# EAGLE board Shield_Motor-REV3c (EAGLE 5.11)
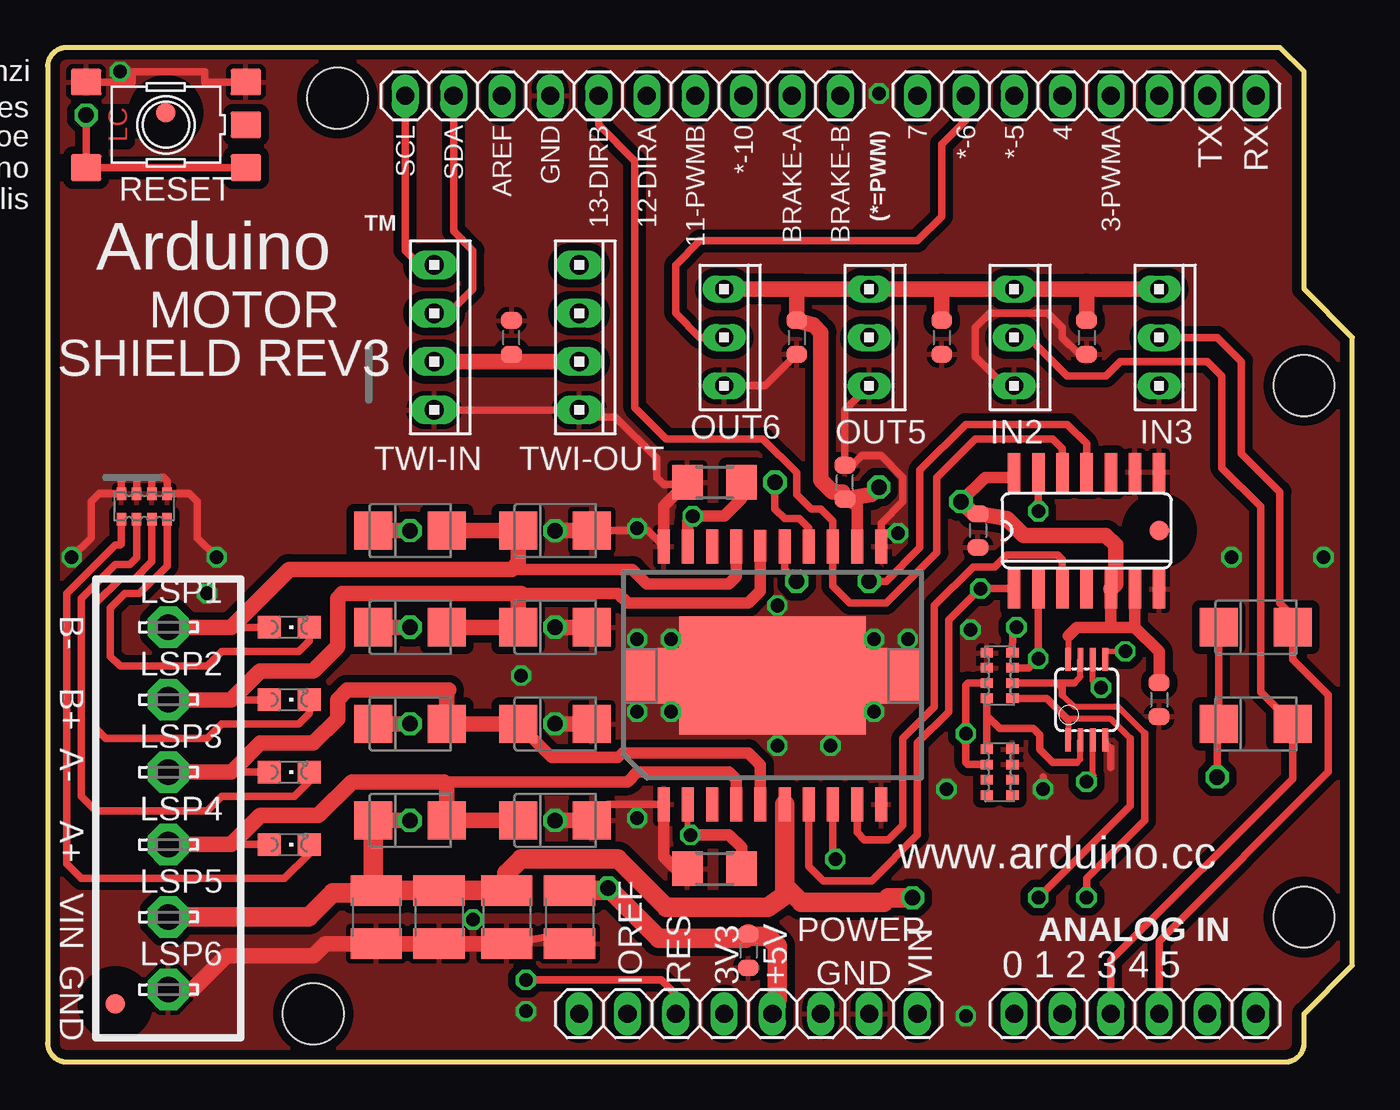
[diagram p0: board, top side]
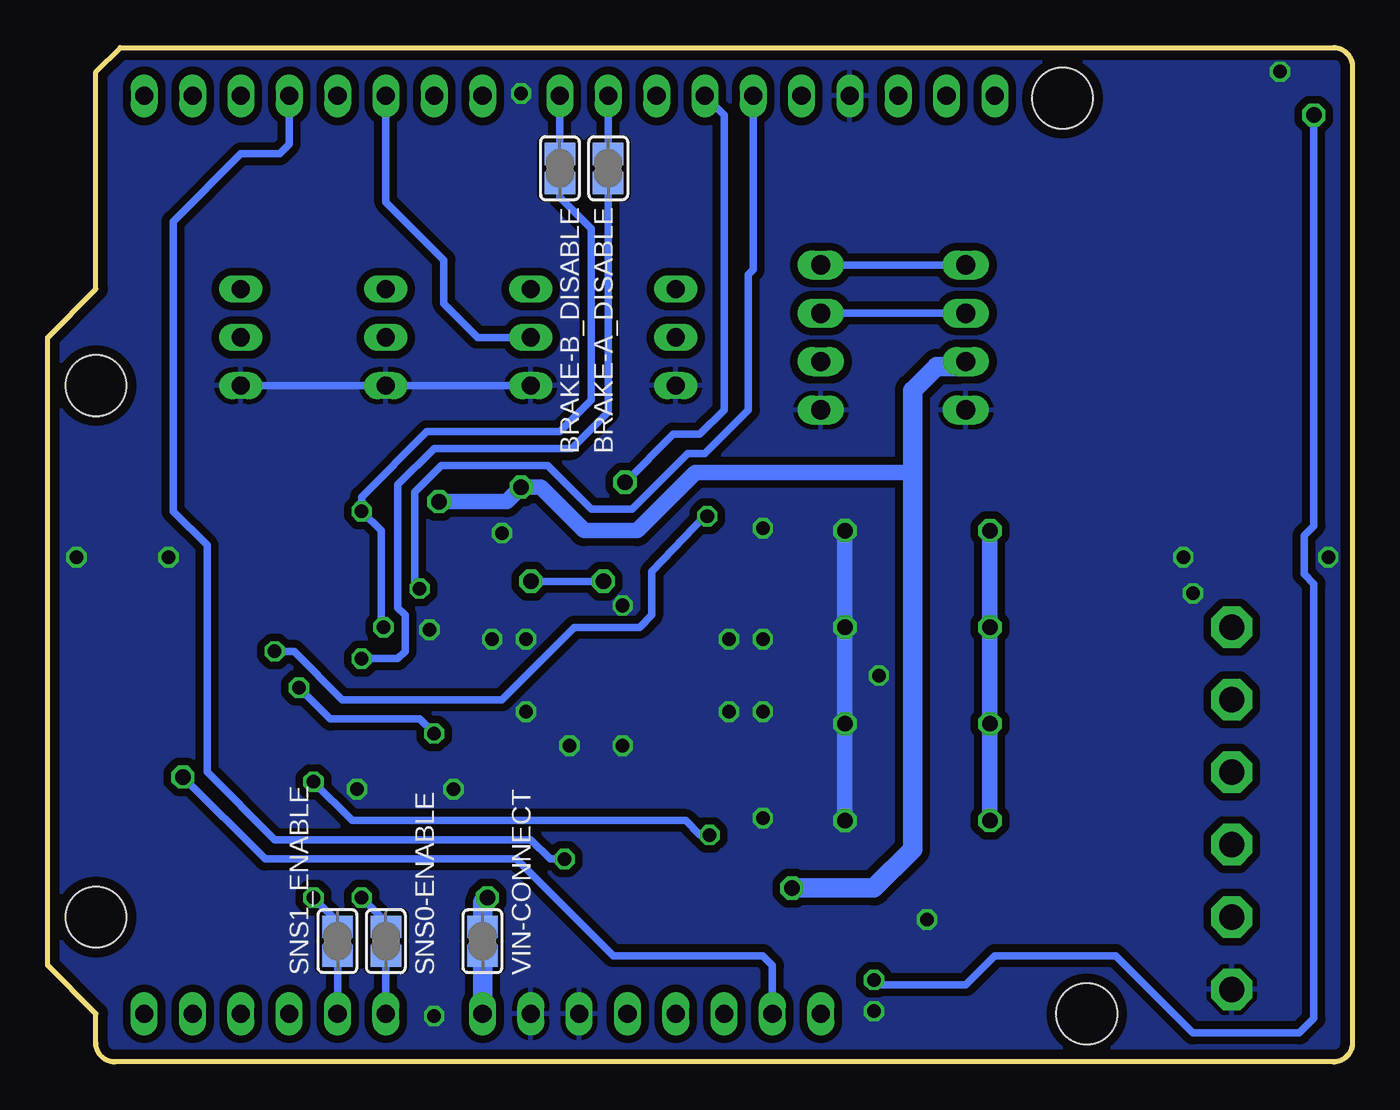
[diagram p1: board, bottom side, seen from below]

Size 68.58 x 53.34 mm. Coordinates in mm from the lower left corner, seen from the top.
Outline: 66.04,2.54 68.58,5.08 68.58,38.1 66.04,40.64 66.04,52.07 64.77,53.34 1,53.34 arc90 0,52.34 0,1 arc90 1,0 65.04,0 arc90 66.04,1 66.04,2.54
Copper layers (1*16): Top 0.035mm / dielectric 1.5mm / Bottom 0.035mm
Design rules "default *": minimum track width 10mil, minimum drill 10mil, track to track 12mil, track to pad 12mil, pad to pad 12mil, via to via 12mil, smd to smd 12mil, copper to edge 20mil, drill to drill 10mil, minimum pad ring 6mil, minimum via ring 6mil, stop-mask expansion 2mil, vias tented up to drill 32mil, thermal gap 10mil
Net classes: 0 default: width 0.406 mm, drill 0.61 mm, clearance 0.152 mm; 1 power: width 0.406 mm, drill 0.61 mm, clearance 0.152 mm; 2 VIN: width 0.406 mm, drill 0.61 mm, clearance 0.152 mm
Holes 3.2 mm at 66.04,35.56 66.04,7.62 15.24,50.67 13.97,2.54

## Footprints (pad centres in the part's own frame; a part is rotated, then mirrored left to right if it is on the bottom)
SJ = smd 1.168 x 1.6: 1 -0.762,0; 2 0.762,0
C0603-ROUND = smd 0.898 x 1.1: 1 -0.889,0; 2 0.889,0
C1210 = smd 1.6 x 2.7: 1 -1.4,0; 2 1.4,0
SMA = smd 2 x 2: P$1 -1.94,0; P$2 1.94,0
FIDUCIA-MOUNT = smd 1.016 x 1.016: P$1 0,0
POWER-SO20 = smd 0.635 x 1.778: P$1 -5.715,-6.782; P$2 -4.445,-6.782; P$3 -3.175,-6.782; P$4 -1.905,-6.782; P$5 -0.635,-6.782; P$6 0.635,-6.782; P$7 1.905,-6.782; P$8 3.175,-6.782; P$9 4.445,-6.782; P$10 5.715,-6.782; P$11 5.715,6.782; P$12 4.445,6.782; P$13 3.175,6.782; P$14 1.905,6.782; P$15 0.635,6.782; P$17 -1.905,6.782; P$18 -3.175,6.782; P$19 -4.445,6.782; P$20 -5.715,6.782 | smd 0.635 x 1.651: P$16 -0.635,6.833 | smd 9.804 x 6.198: P$21 0,0 | smd 3.048 x 2.921: P$22 -6.426,0; P$23 6.426,0
SO14 = smd 0.66 x 2.032: 1 -3.81,-3.073; 2 -2.54,-3.073; 3 -1.27,-3.073; 4 0,-3.073; 5 1.27,-3.073; 6 2.54,-3.073; 7 3.81,-3.073; 8 3.81,3.073; 9 2.54,3.073; 10 1.27,3.073; 11 0,3.073; 12 -1.27,3.073; 13 -2.54,3.073; 14 -3.81,3.073
MSOP08 = smd 0.3 x 1.2: 1 -0.976,-2.113; 2 -0.326,-2.113; 3 0.324,-2.113; 4 0.974,-2.113; 5 0.974,2.112; 6 0.324,2.112; 7 -0.326,2.112; 8 -0.976,2.112
10X03MTA = drill 0.95 long: 1 2.54,0; 2 0,0; 3 -2.54,0
1X06-TH = drill 0.95 pad 1.422 long: 1 -6.35,0; 2 -3.81,0; 3 -1.27,0; 4 1.27,0; 5 3.81,0; 6 6.35,0
1X10-TH = drill 0.95 pad 1.422 long: 1 -11.43,0; 2 -8.89,0; 3 -6.35,0; 4 -3.81,0; 5 -1.27,0; 6 1.27,0; 7 3.81,0; 8 6.35,0; 9 8.89,0; 10 11.43,0
1X08-TH = drill 0.95 pad 1.422 long: 1 -8.89,0; 2 -6.35,0; 3 -3.81,0; 4 -1.27,0; 5 1.27,0; 6 3.81,0; 7 6.35,0; 8 8.89,0
CHIPLED_0805 = smd 1.2 x 1.2: A 0,-1.05; C 0,1.05
LSP13 = drill 1.321 pad 2.159 octagon: MP 0,0
R1206 = smd 1.6 x 1.803: 1 -1.422,0; 2 1.422,0
TS42 = smd 1.6 x 1.4: 1 -4.2,2.25; 2 4.2,2.25; 3 -4.2,-2.25; 4 4.2,-2.25; 5 -4.2,0
CAY16 = smd 0.5 x 0.65: 1 -1.2,-0.675; 2 -0.4,-0.675; 3 0.4,-0.675; 4 1.2,-0.675; 5 1.2,0.675; 6 0.4,0.675; 7 -0.4,0.675; 8 -1.2,0.675
10X04MTA = drill 1.016 long: 1 3.81,0; 2 1.27,0; 3 -1.27,0; 4 -3.81,0

## Placement (x,y rotation side)
BRAKE-A_DISABLE  [SJ]  39.12,46.99 270 bottom
BRAKE-B_DISABLE  [SJ]  41.66,46.99 270 bottom
C1  100n  [C0603-ROUND]  39.37,38.1 270 top
C2  100n  [C0603-ROUND]  24.38,38.1 90 top
C3  100n  [C0603-ROUND]  54.61,38.1 270 top
C4  100n  [C0603-ROUND]  46.99,38.1 270 top
C5  10u 35V  [C1210]  27.43,7.62 270 top
C6  100n  [C0603-ROUND]  36.83,5.84 270 top
C7  100n  [C0603-ROUND]  41.91,30.48 90 top
C8  100n  [C0603-ROUND]  48.9,27.94 270 top
C9  10u 35V  [C1210]  24.13,7.62 270 top
C10  10u 35V  [C1210]  20.57,7.62 270 top
C11  10u 35V  [C1210]  17.27,7.62 270 top
C12  100n  [C0603-ROUND]  58.42,19.05 270 top
D1  SS14  [SMA]  19.05,12.7 0 top
D2  SS14  [SMA]  19.05,17.78 0 top
D3  SS14  [SMA]  19.05,22.86 0 top
D4  SS14  [SMA]  19.05,27.94 0 top
D5  SS14  [SMA]  26.67,12.7 0 top
D6  SS14  [SMA]  26.67,17.78 0 top
D7  SS14  [SMA]  26.67,22.86 0 top
D8  SS14  [SMA]  26.67,27.94 0 top
D9  SS14  [SMA]  63.5,22.86 0 top
D10  SS14  [SMA]  63.5,17.78 0 top
FID1  FIDUCIALMOUNT  [FIDUCIA-MOUNT]  6.22,49.91 0 top
FID2  FIDUCIALMOUNT  [FIDUCIA-MOUNT]  3.56,3.05 0 top
FID3  FIDUCIALMOUNT  [FIDUCIA-MOUNT]  58.42,27.94 0 top
IC1  L298P  [POWER-SO20]  38.1,20.32 0 top
IC2  4077D  [SO14]  54.61,27.94 0 top
IC4  LMV358MMX  [MSOP08]  54.61,19.05 0 top
IN2  white  [10X03MTA]  50.8,38.1 270 top
IN3  white  [10X03MTA]  58.42,38.1 270 top
JANALOG  6x1F-H8.5-L14.5mm  [1X06-TH]  57.15,2.54 0 top
JHIGH  10x1F-H8.5-L14.5mm  [1X10-TH]  30.23,50.8 180 top
JLOW  8x1F-H8.5-L14.5mm  [1X08-TH]  54.61,50.8 180 top
LED1  Yellow  [CHIPLED_0805]  12.7,11.43 270 top
LED2  Yellow  [CHIPLED_0805]  12.7,15.24 270 top
LED3  Yellow  [CHIPLED_0805]  12.7,19.05 270 top
LED4  Yellow  [CHIPLED_0805]  12.7,22.86 270 top
LSP1  LSP13  [LSP13]  6.35,22.86 0 top
LSP2  LSP13  [LSP13]  6.35,19.05 0 top
LSP3  LSP13  [LSP13]  6.35,15.24 0 top
LSP4  LSP13  [LSP13]  6.35,11.43 0 top
LSP5  LSP13  [LSP13]  6.35,7.62 0 top
LSP6  LSP13  [LSP13]  6.35,3.81 0 top
OUT5  orange  [10X03MTA]  43.18,38.1 270 top
OUT6  orange  [10X03MTA]  35.56,38.1 270 top
POWER  8x1F-H8.5-L14.5mm  [1X08-TH]  36.83,2.54 0 top
R1  0R15  [R1206]  35.05,10.16 180 top
R2  0R15  [R1206]  35.05,30.48 180 top
RESET  TS42  [TS42]  6.22,49.28 180 top
RN1  10K  [CAY16]  5.08,29.21 0 top
RN2  10K  [CAY16]  50.04,20.32 270 top
RN3  1K  [CAY16]  50.04,15.24 270 top
SNS0-ENABLE  [SJ]  50.8,6.35 90 bottom
SNS1_ENABLE  [SJ]  53.34,6.35 90 bottom
TWI-IN  [10X04MTA]  20.32,38.1 270 top
TWI-OUT  [10X04MTA]  27.94,38.1 270 top
U$1  DISCLAIMER  [DISCLAIMER]  -12.06,-22.86 0 top  (outside the outline)
VIN-CONNECT  [SJ]  45.72,6.35 90 bottom

## Library data of the parts
BRAKE-A_DISABLE BRAKE-B_DISABLE SNS0-ENABLE SNS1_ENABLE VIN-CONNECT = jumper
C1-C12 D1-D10 FID1-FID3 IC1 JANALOG JHIGH JLOW POWER R1 R2 RESET U$1 = SmartPrj
IC2 = 40xx
IC4 = linear
IN2 IN3 OUT5 OUT6 = SmartPrj; OC_FARNELL: unknown; OC_NEWARK: unknown
LED1-LED4 = led
LSP1-LSP6 = solpad
RN1-RN3 = resistor-dil
TWI-IN TWI-OUT = con-amp

## Nets
5: JLOW.6 OUT5.2
5-GND: RESET.5
6: JLOW.7 OUT6.2
+3V3 [power]: POWER.4
+5V [power]: C1.1 C2.1 C3.1 C4.1 C5.1 C6.1 C7.1 C8.1 C12.1 IC1.P$12 IC2.5 IC2.6 IC2.14 IC4.8 IN2.3 IN3.3 OUT5.3 OUT6.3 POWER.5 TWI-IN.2 TWI-OUT.2
A2: D10.P$2 IN2.2 JANALOG.3
A3: D9.P$2 IN3.2 JANALOG.4
A4: JANALOG.5
A5: JANALOG.6
AREF: JHIGH.8
BRAKEA: BRAKE-A_DISABLE.1 BRAKE-A_DISABLE.2 IC2.2 JHIGH.2 RN2.7
BRAKEB: BRAKE-B_DISABLE.1 BRAKE-B_DISABLE.2 IC2.13 JHIGH.1 RN2.8
DIRA: IC1.P$7 IC2.1 JHIGH.5
DIRA#: IC1.P$9 IC2.3
DIRB: IC1.P$13 IC2.12 JHIGH.6
DIRB#: IC1.P$15 IC2.11
GND [power]: C1.2 C2.2 C3.2 C4.2 C5.2 C6.2 C7.2 C8.2 C9.2 C10.2 C11.2 C12.2 D5.P$2 D6.P$2 D7.P$2 D8.P$2 IC1.P$1 IC1.P$10 IC1.P$11 IC1.P$20 IC1.P$21 IC1.P$22 IC1.P$23 IC2.7 IC2.8 IC2.9 IC4.4 IN2.1 IN3.1 JHIGH.7 LSP6.MP OUT5.1 OUT6.1 POWER.6 POWER.7 R1.2 R2.2 RESET.3 RESET.4 RN1.5 RN1.6 RN1.7 RN1.8 RN2.1 RN2.2 RN3.7 RN3.8 TWI-IN.1 TWI-OUT.1
IOREF: D9.P$1 D10.P$1 POWER.2
N$1: LED4.C RN1.4
N$2: LED3.C RN1.3
N$3: LED2.C RN1.2
N$4: LED1.C RN1.1
N$5: IC4.2 RN2.4 RN3.1
N$7: IC4.6 RN2.3 RN3.2
OUT1: D1.P$2 D5.P$1 IC1.P$4 LED1.A LSP4.MP
OUT2: D2.P$2 D6.P$1 IC1.P$5 LED2.A LSP3.MP
OUT3: D4.P$2 D8.P$1 IC1.P$17 LED4.A LSP1.MP
OUT4: D3.P$2 D7.P$1 IC1.P$16 LED3.A LSP2.MP
PWMA: IC1.P$8 JLOW.4
PWMB: IC1.P$14 JHIGH.4
RESET: POWER.3 RESET.1 RESET.2
SCL: JHIGH.10 TWI-IN.4 TWI-OUT.4
SDA: JHIGH.9 TWI-IN.3 TWI-OUT.3
SNS0: IC4.1 JANALOG.1 RN2.5 SNS0-ENABLE.1 SNS0-ENABLE.2
SNS1: IC4.7 JANALOG.2 RN2.6 SNS1_ENABLE.1 SNS1_ENABLE.2
SNSA: IC1.P$2 IC4.3 R1.1
SNSB: IC1.P$19 IC4.5 R2.1
VIN [VIN]: POWER.8 VIN-CONNECT.1
VMOT: C9.1 C10.1 C11.1 D1.P$1 D2.P$1 D3.P$1 D4.P$1 IC1.P$6 LSP5.MP VIN-CONNECT.2

## Tracks (layer width: path | path; a pad name or v marks a point on that pad's centre or on a via)
5
  Bottom 0.406: OUT5.2 45.97,38.1 47.75,39.88 47.75,42.16 50.8,45.21 JLOW.6
6
  Top 0.406: OUT6.2 34.29,38.1 33.02,39.37 33.02,41.91 34.29,43.18 45.72,43.18 46.99,44.45 46.99,48.26 48.26,49.53 JLOW.7
+5V  (via drill 0.81)
  Top 0.305: 53.63,22.39 IC4.8
  Top 0.406: 50.8,30.73 IC2.14 | 24.38,36.83 C2.1
  Top 0.61: 53.63,22.39 54.1,22.86 55.88,22.86 | 55.88,22.86 57.15,22.86 | 57.15,22.86 58.42,21.59 C12.1 | 41.78,29.97 C7.1 42.55,29.2 IC1.P$12 | IC2.5 55.88,22.86 | 57.15,22.86 IC2.6 | 50.8,30.73 49.28,30.73 v48.01,29.46
  Top 0.813: 39.62,40.64 OUT6.3 | 39.62,40.64 OUT5.3 46.99,40.64 | 39.62,40.64 39.37,40.39 C1.1 40.26,38.73 40.64,38.35 40.64,30.61 41.27,29.97 41.78,29.97 | 54.61,40.64 IN2.3 46.99,40.64 | 54.61,40.64 IN3.3 | 54.61,40.64 C3.1 | v48.01,29.46 48.64,28.83 C8.1 50.42,28.57 51.31,27.69 55.63,27.69 56.13,27.18 56.13,25.12 IC2.5 | 46.99,40.64 C4.1 | TWI-IN.2 24.38,36.83 TWI-OUT.2 | C7.1 43.29,29.83 v43.69,30.23
  Top 1.016: POWER.5 38.1,3.05 38.35,3.3 38.35,6.1 37.85,6.6 36.96,6.6 C6.1 36.7,6.6 36.7,6.49 32.12,6.49 v29.46,9.14 29.59,9.02 C5.1
  Bottom 0.813: v48.01,29.46 44.45,29.46 v43.69,30.23 42.67,30.23 40.39,27.94 37.59,27.94 34.54,30.99 23.11,30.99
  Bottom 1.016: v29.46,9.14 25.15,9.14 23.11,11.18 23.11,30.99 23.11,35.31 21.84,36.58 20.57,36.58 TWI-IN.2
A2
  Top 0.406: IN2.2 51.56,38.1 53.59,36.07 55.63,36.07 56.39,36.83 60.96,36.83 61.72,36.07 61.72,31.24 63.75,29.21 63.75,19.47 D10.P$2 65.44,14.89 55.88,5.33 JANALOG.3
A3
  Top 0.406: IN3.2 61.47,38.1 62.74,36.83 62.74,32 64.77,29.97 64.77,24.13 65.53,23.37 65.53,22.95 D9.P$2 65.44,21.17 67.31,19.3 67.31,15.24 58.42,6.35 JANALOG.4
BRAKEA  (via drill 0.71)
  Top 0.406: RN2.7 51.58,20.72 v52.07,21.21 IC2.2
  Bottom 0.406: v52.07,21.21 50.16,21.21 49.78,21.59 49.78,23.5 50.16,23.88 50.16,30.35 48.26,32.26 41.02,32.26 39.12,34.16 BRAKE-A_DISABLE.2 BRAKE-A_DISABLE.1 JHIGH.2
BRAKEB  (via drill 0.71)
  Top 0.406: RN2.8 50.73,22.54 v50.93,22.86 | v52.07,28.96 IC2.13
  Bottom 0.406: v50.93,22.86 51.05,22.99 51.05,27.94 v52.07,28.96 52.07,29.72 48.64,33.15 41.66,33.15 40.01,34.8 40.01,43.81 41.66,45.47 BRAKE-B_DISABLE.2 BRAKE-B_DISABLE.1 JHIGH.1
DIRA  (via drill 0.71)
  Top 0.305: 50.77,24.89 IC2.1
  Top 0.406: 50.77,24.89 v49.02,24.89 47.37,23.24 47.37,18.41 45.72,16.76 45.72,11.94 43.31,9.53 40.77,9.53 40.01,10.29 IC1.P$7
  Bottom 0.406: v49.02,24.89 49.28,25.15 49.28,29.97 47.88,31.37 42.29,31.37 40.01,29.08 37.85,29.08 34.92,32 34.04,32 31.75,34.29 31.75,41.4 31.5,41.66 JHIGH.5
DIRA#
  Top 0.406: IC2.3 53.34,26.42 53.09,26.67 50.42,26.67 49.78,26.04 48.64,26.04 46.61,24 46.61,18.67 44.96,17.02 44.96,12.45 44.2,11.68 42.93,11.68 42.55,12.06 IC1.P$9
DIRB
  Top 0.406: IC2.12 53.34,32.26 52.83,32.77 48.77,32.77 46.74,30.73 46.74,26.8 44.07,24.13 42.16,24.13 41.27,25.02 IC1.P$13 41.27,28.45 40.64,29.08 40.13,29.08 39.37,29.84 39.37,30.99 37.59,32.77 32.51,32.77 30.86,34.42 30.86,47.37 28.96,49.28 JHIGH.6
DIRB#  (via drill 0.81)
  Top 0.406: IC2.11 54.61,32.51 53.59,33.53 48.26,33.53 45.85,31.11 45.85,27.05 44.07,25.27 v43.18,25.27 | v39.37,25.27 38.73,25.91 IC1.P$15
  Bottom 0.406: v39.37,25.27 v43.18,25.27
GND  (via drill 0.71, 0.81)
  Top 0.305: IC4.4 55.58,16.81 55.88,16.51
  Top 0.406: RESET.4 4.45,51.53 4.45,52.07 8.26,52.07 8.26,51.53 RESET.3 | OUT6.1 37.72,35.56 C1.2 | OUT5.1 41.91,34.29 C7.2 42.05,31.13 42.8,31.88 43.81,31.88 44.96,30.73 44.96,29.46 43.81,28.32 IC1.P$11 | C3.2 54.23,37.21 53.34,38.1 53.34,38.61 52.58,39.37 49.53,39.37 48.77,38.61 48.77,37.08 50.29,35.56 IN2.1 | D8.P$2 31.55,27.94 IC1.P$20 | C9.2 27.18,6.73 | IC1.P$1 29.45,13.54 D5.P$2 | R2.2 33.5,30.35 32.38,30.35 32,30.73 32,31.75 29.84,33.91 28.32,33.91 TWI-OUT.1 TWI-IN.1 | 4.57,30.73 4.06,30.73 3.88,30.55 RN1.8 2.71,29.89 2.29,29.46 2.29,27.56 v1.27,26.54 | 4.57,30.73 5.33,30.73 | 5.33,30.73 6.1,30.73 6.28,30.55 RN1.5 7.45,29.89 7.87,29.46 7.87,27.56 v8.89,26.54 | RN1.7 4.68,30.63 4.57,30.73 | RN1.6 5.48,30.59 5.33,30.73 | v48.51,22.73 48.64,22.99 | v52.32,14.35 52.32,14.99 | 55.88,16.51 55.88,15.49
  Top 0.61: IC1.P$1 32.38,10.79 33.02,10.16 R1.2 | IC1.P$20 32.38,29.23 R2.2
  Top 0.813: v26.67,27.94 D8.P$2 | v26.67,12.7 D5.P$2 | v26.67,17.78 D6.P$2 | v26.67,22.86 D7.P$2 | LSP6.MP 7.62,3.81 9.4,5.59 13.97,5.59 14.6,6.22 C11.2 C10.2 C9.2
  Bottom 0.406: OUT5.1 IN2.1 IN3.1
  Bottom 0.813: v26.67,27.94 v26.67,22.86 v26.67,17.78 v26.67,12.7
  other vias: 43.69,50.93 48.26,2.41 67.06,26.54 25.15,2.67 43.43,22.23 32.77,22.23 43.43,18.41 32.77,18.41 38.35,24 38.35,16.64 47.24,14.35 30.99,12.83 30.99,28.07 24.89,20.32 8.38,24.64 3.81,52.07 62.23,26.54 22.35,7.49 30.99,22.23 30.99,18.41 45.21,22.23 41.15,16.64 44.7,27.81
  pour Bottom (isolate 0.406): -2.54,55.88 71.12,55.88 71.12,-2.54 -2.54,-2.54
  pour Top (isolate 0.406): -5.08,53.34 68.58,53.34 68.58,0 -5.08,0
IOREF  (via drill 0.81)
  Top 0.406: v61.47,14.99 61.47,17.69 D10.P$1 D9.P$1
  Bottom 0.406: POWER.2 30.48,5.08 30.99,5.59 38.86,5.59 43.94,10.67 57.15,10.67 v61.47,14.99
N$1
  Top 0.406: LED4.C 13.75,22.13 13.21,21.59 9.14,21.59 8.38,20.83 3.81,20.83 3.3,21.34 3.3,23.88 4.06,24.64 4.83,24.64 6.28,26.09 RN1.4
N$2
  Top 0.406: LED3.C 13.75,18.32 13.21,17.78 9.14,17.78 8.38,17.02 3.05,17.02 2.54,17.53 2.54,24.13 3.81,25.4 4.57,25.4 5.48,26.31 RN1.3
N$3
  Top 0.406: LED2.C 13.75,14.77 12.95,13.97 9.14,13.97 8.38,13.21 2.54,13.21 1.78,13.97 1.78,24.38 3.56,26.16 4.32,26.16 4.68,26.52 RN1.2
N$4
  Top 0.406: LED1.C 13.75,10.96 12.45,9.65 1.78,9.65 1.02,10.41 1.02,24.64 3.56,27.18 3.81,27.18 3.88,27.25 RN1.1
N$5
  Top 0.305: IC4.2 54.28,15.93 54.1,15.75
  Top 0.406: 49.36,18.2 49.36,18.29 RN2.4 | 54.1,15.75 52.83,15.75 52.14,16.44 52.14,17.2 51.82,17.53 50.04,17.53 49.36,18.2 | RN3.1 49.36,18.2
N$7  (via drill 0.71)
  Top 0.305: 49.38,19.94 RN2.3 | IC4.6 54.93,20.01 v55.37,19.68
  Top 0.406: RN3.2 48.37,15.64 48.26,15.75 v48.26,17.27 48.26,19.81 48.39,19.94 49.38,19.94
  Bottom 0.406: v55.37,19.68 53.72,18.03 49.02,18.03 v48.26,17.27
OUT1
  Top 0.406: 9.4,11.43 LED1.A
  Top 0.61: IC1.P$4 36.2,14.86 35.81,15.24 30.99,15.24 30.48,14.73 20.83,14.73
  Top 0.813: LSP4.MP 9.4,11.43 9.65,11.43 11.18,12.95 14.22,12.95 16,14.73 20.83,14.73 20.99,14.57 D1.P$2 D5.P$1
OUT2
  Top 0.406: LED2.A 10.16,15.24 9.91,15.49
  Top 0.61: IC1.P$5 37.47,15.62 36.83,16.26 30.23,16.26 29.97,16 26.51,16 D6.P$1
  Top 0.813: LSP3.MP 9.65,15.24 9.91,15.49 11.18,16.76 13.97,16.76 15.24,18.03 15.24,19.05 15.75,19.56 21.08,19.56 20.99,19.47 D2.P$2 D6.P$1
OUT3
  Top 0.406: 9.4,22.86 LED4.A
  Top 0.61: IC1.P$17 36.2,25.53 35.81,25.15 31.5,25.15 30.73,25.91 24.38,25.91
  Top 0.813: LSP1.MP 9.4,22.86 9.65,22.86 12.7,25.91 24.38,25.91 24.73,26.25 D8.P$1 D4.P$2
OUT4
  Top 0.406: 9.65,19.05 LED3.A
  Top 0.61: 24.89,24.64 29.97,24.64 30.48,24.13 36.83,24.13 37.47,24.77 IC1.P$16
  Top 0.813: LSP2.MP 9.65,19.05 11.18,20.57 13.97,20.57 15.24,21.84 15.24,24.38 15.49,24.64 24.89,24.64 24.73,24.48 D7.P$1 | D7.P$1 D3.P$2 | D7.P$1 25.15,22.86
PWMA  (via drill 0.71)
  Top 0.406: IC1.P$8 41.27,10.79 v41.4,10.67
  Bottom 0.406: v41.4,10.67 42.16,10.67 43.18,11.68 56.64,11.68 60.2,15.24 60.2,27.18 61.98,28.96 61.98,44.2 58.42,47.75 56.39,47.75 55.88,48.26 JLOW.4
PWMB  (via drill 0.81)
  Top 0.406: IC1.P$14 40.01,28.07 39.5,28.57 38.73,28.57 38.23,29.08 38.23,30.35 v38.23,30.48
  Bottom 0.406: v38.23,30.48 35.69,33.02 34.29,33.02 33.02,34.29 33.02,49.78 JHIGH.4
RESET  (via drill 0.71, 0.81)
  Top 0.305: v2.03,49.78 v2.02,49.77
  Top 0.406: v2.02,49.77 RESET.2 RESET.1 | v25.15,4.32 32.26,4.32 33.02,3.56 POWER.3
  Bottom 0.406: v2.03,49.78 2.03,28.19 2.54,27.69 2.54,25.65 2.03,25.15 2.03,2.29 2.79,1.52 8.38,1.52 12.45,5.59 18.8,5.59 20.32,4.06 24.89,4.06 v25.15,4.32
SCL
  Top 0.406: JHIGH.10 18.8,42.67 19.56,41.91 TWI-IN.4
  Bottom 0.406: TWI-IN.4 TWI-OUT.4
SDA
  Top 0.406: JHIGH.9 21.34,43.69 22.35,42.67 22.35,40.64 21.08,39.37 TWI-IN.3
  Bottom 0.406: TWI-IN.3 TWI-OUT.3
SNS0  (via drill 0.71)
  Top 0.305: IC4.1 53.63,17.99 53.67,18.03 55.88,18.03 56.9,17.02
  Top 0.406: RN2.5 52.51,19.12 53.63,17.99 | v52.07,8.64 56.9,13.46 56.9,17.02
  Bottom 0.406: JANALOG.1 SNS0-ENABLE.1 SNS0-ENABLE.2 50.8,7.37 v52.07,8.64
SNS1  (via drill 0.71)
  Top 0.305: IC4.7 54.28,20.25 53.96,19.92 | 57.66,17.27 56.26,18.67 53.98,18.67 53.34,19.3
  Top 0.406: 53.09,19.92 RN2.6 | 53.09,19.92 53.96,19.92 | v54.61,8.64 54.61,9.65 57.66,12.7 57.66,17.27 | 53.34,19.3 53.34,19.67 53.09,19.92
  Bottom 0.406: JANALOG.2 SNS1_ENABLE.1 SNS1_ENABLE.2 53.34,7.37 v54.61,8.64
SNSA  (via drill 0.71)
  Top 0.305: IC1.P$2 33.66,12.06 v33.78,11.94 | 54.93,15.06 IC4.3
  Top 0.406: v54.61,14.73 54.93,15.06
  Top 0.61: R1.1 36.47,11.28 35.81,11.94 v33.78,11.94
  Bottom 0.406: v33.78,11.94 34.29,11.94 35.05,12.7 52.58,12.7 v54.61,14.73
SNSB  (via drill 0.71)
  Top 0.305: IC4.5 55.58,21.55 v56.64,21.59
  Top 0.61: IC1.P$19 33.66,28.45 v33.91,28.7 35.56,28.7 36.47,29.62 R2.1
  Bottom 0.406: v33.91,28.7 34.04,28.7 36.83,25.78 36.83,23.5 37.47,22.86 40.89,22.86 44.7,19.05 53.09,19.05 55.63,21.59 v56.64,21.59
VIN
  Bottom 1.016: POWER.8 VIN-CONNECT.1
VMOT  (via drill 0.81)
  Top 0.813: v19.05,27.94 D4.P$1 | D1.P$1 v19.05,12.7 | v19.05,17.78 D2.P$1 | v19.05,22.86 D3.P$1
  Top 1.016: LSP5.MP 13.72,7.62 14.99,8.89 17.14,8.89 C11.1 | 38.73,9.14 38.73,8.76 37.85,8.13 32.51,8.13 29.97,10.67 24.89,10.67 24.13,9.91 C9.1 C10.1 C11.1 | 38.73,9.14 IC1.P$6 | 38.73,9.14 38.86,9.14 39.62,8.38 43.94,8.38 44.2,8.64 v45.47,8.64 | D1.P$1 17.11,9.18 C11.1
  Bottom 0.61: VIN-CONNECT.2 45.72,5.59
  Bottom 0.813: v19.05,12.7 v19.05,17.78 v19.05,22.86 v19.05,27.94
  Bottom 1.016: v45.47,8.64 45.72,8.38 VIN-CONNECT.2

## Text on the board
Top: LC
tPlace: B- | B+ | A- | A+ | VIN | GND
tNames: M.Banzi | D.Cuartielles | T.Igoe | SCL | SDA | AREF | GND | 13-DIRB | 12-DIRA | 11-PWMB | *-10 | BRAKE-A | BRAKE-B | 7 | *-6 | *-5 | 4 | 3-PWMA | TX | RX | G.Martino | D.Mellis | TM | (*=PWM) | Arduino | MOTOR | SHIELD REV3 | www.arduino.cc | ANALOG IN | IOREF | RES | 3V3 | +5V | GND | VIN | 0 1 2 3 4 5